# Altium PCB 8 IR.PcbDoc
Units mm, origin at the board's own origin, x right, y up, seen from the top; angles counter-clockwise.
Board outline 200 x 50 mm, 2 copper layers (Top Layer, Bottom Layer); 71 components, 43 nets, 170 pads, 0 vias.
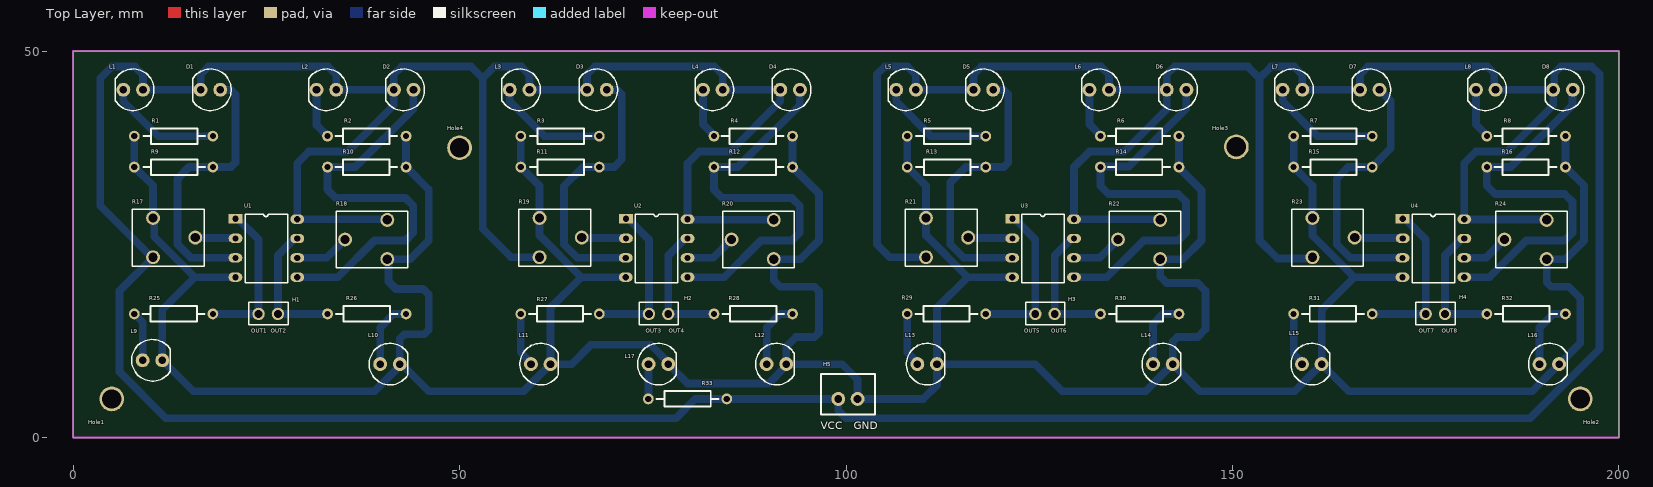
[diagram p0: Top Layer view]
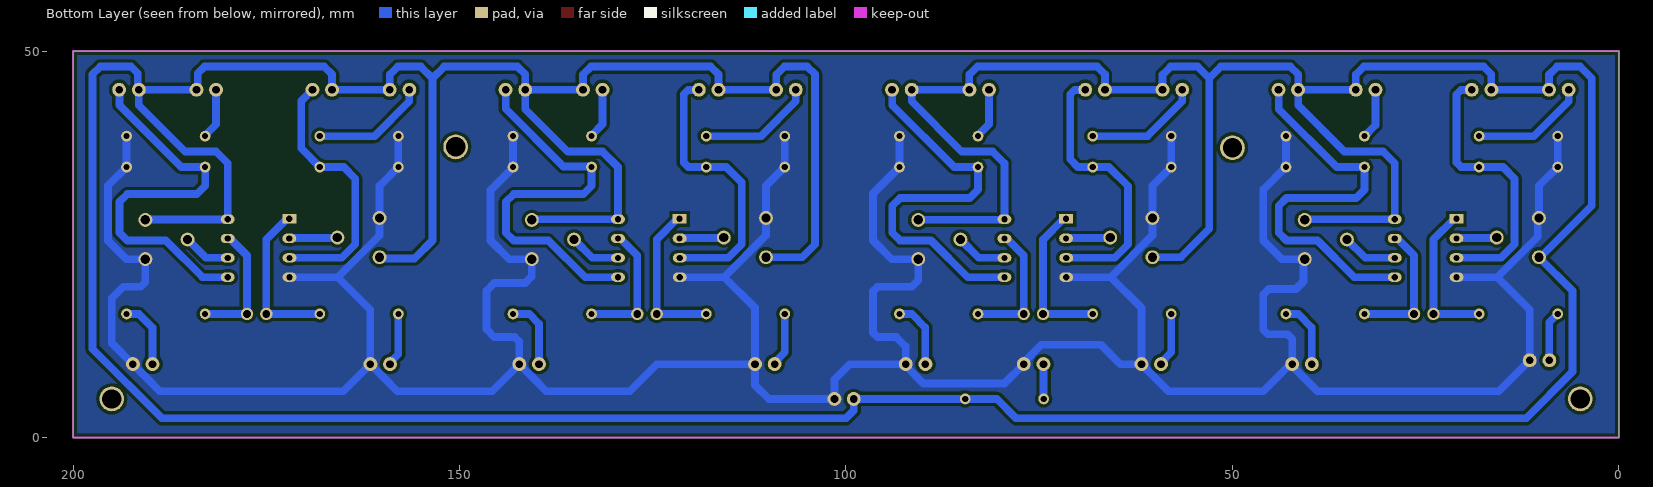
[diagram p1: Bottom Layer view, seen from below]
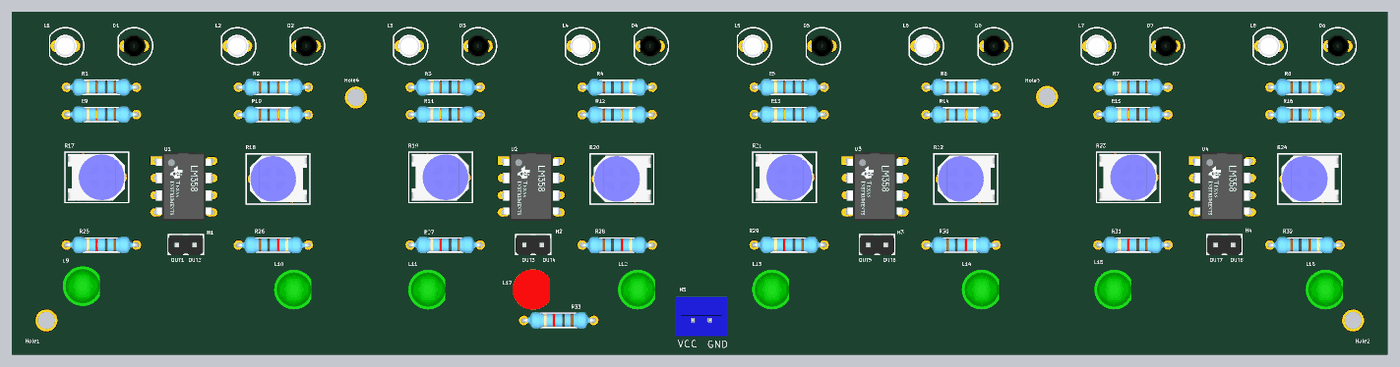
[diagram p2: 3D render of the assembled board from above, using the file's embedded part models]

## Layer stack, top to bottom
Top Solder: solder mask 0.0102, Solder Resist, Dk 3.5
Top Layer: signal copper 0.0356
Dielectric 1: dielectric 0.32, FR-4, Dk 4.8
Bottom Layer: signal copper 0.0356
Bottom Solder: solder mask 0.0102, Solder Resist, Dk 3.5

## Board outline
0,0 200,0 200,50 0,50

## Design rules (kind name [scope] priority, off if disabled: settings)
Clearance [All] p1: gap=0.4 ignorepadtopadclearanceinfootprint=FALSE
PolygonConnect [All] p1: connectstyle=Direct reliefconductorwidth=0.254 reliefentries=4 polygonreliefangle="90 Angle" airgapwidth=0.254
RoutingVias [All] p1: holewidth=0.711 width=1.27 viastyle="Through Hole" minholewidth=0.711 minwidth=1.27 maxholewidth=0.711 maxwidth=1.27
SilkToSolderMaskClearance [IsPad] p1: minsilkscreentomaskgap=0.001 clearancetoexposedcopper=TRUE
SolderMaskExpansion [All] p1: expansion=0.102 istentingtop=FALSE
UnRoutedNet [All] p1: checkbadconnections=TRUE
Width [All] p1: maxlimit=1 minlimit=0.254 preferedwidth=1
28 further rules are at their usual default settings.

## Components (designator, comment, footprint, x,y, rotation, side; value= is the part's Value field where it differs from the comment)
D1 "PHOTO DIODE" PHOYODIODE 17.77,45 r180 top
D2 "PHOTO DIODE" PHOYODIODE 42.77,45 r180 top
D3 "PHOTO DIODE" PHOYODIODE 67.77,45 r180 top
D4 "PHOTO DIODE" PHOYODIODE 92.77,45 r180 top
D5 "PHOTO DIODE" PHOYODIODE 117.77,45 r180 top
D6 "PHOTO DIODE" PHOYODIODE 142.77,45 r180 top
D7 "PHOTO DIODE" PHOYODIODE 167.77,45 r180 top
D8 "PHOTO DIODE" PHOYODIODE 192.77,45 r180 top
H1 "2 pin header" "header 2" 24,16 r0 top
H2 "2 pin header" "header 2" 74.5,16 r0 top
H3 "2 pin header" "header 2" 124.5,16 r0 top
H4 "2 pin header" "header 2" 175,16 r0 top
H5 "JST XH (2 pin)" "jst 2 pin XH" 99,5 r0 top
Hole1 "M3 hole 2.5MM" "M3 Hole" 5,5 r90 top
Hole2 "M3 hole 2.5MM" "M3 Hole" 195,5 r90 top
Hole3 "M3 hole 2.5MM" "M3 Hole" 150.505,37.608 r90 top
Hole4 "M3 hole 2.5MM" "M3 Hole" 50,37.5 r90 top
L1 "IR" "LED IR" 7.77,45 r180 top
L2 "IR" "LED IR" 32.77,45 r180 top
L3 "IR" "LED IR" 57.77,45 r180 top
L4 "IR" "LED IR" 82.77,45 r180 top
L5 "IR" "LED IR" 107.77,45 r180 top
L6 "IR" "LED IR" 132.77,45 r180 top
L7 "IR" "LED IR" 157.77,45 r180 top
L8 "IR" "LED IR" 182.77,45 r180 top
L9 "LED GREEN" "LED GREEN" 10.27,10 r0 top
L10 "LED GREEN" "LED GREEN" 41,9.5 r0 top
L11 "LED GREEN" "LED GREEN" 60.5,9.5 r0 top
L12 "LED GREEN" "LED GREEN" 91,9.5 r0 top
L13 "LED GREEN" "LED GREEN" 110.5,9.5 r0 top
L14 "LED GREEN" "LED GREEN" 141,9.5 r0 top
L15 "LED GREEN" "LED GREEN" 160.27,9.5 r0 top
L16 "LED GREEN" "LED GREEN" 191,9.5 r0 top
L17 "LED RED" "LED RED" 75.73,9.5 r0 top
R1 "100R" 100R 13,39 r180 top
R2 "100R" 100R 38,39 r0 top
R3 "100R" 100R 63,39 r180 top
R4 "100R" 100R 88,39 r0 top
R5 "100R" 100R 113,39 r180 top
R6 "100R" 100R 138,39 r0 top
R7 "100R" 100R 163,39 r180 top
R8 "100R" 100R 188,39 r0 top
R9 "10k" 10k 13,35 r180 top
R10 "10k" 10k 38,35 r0 top
R11 "10k" 10k 63,35 r180 top
R12 "10k" 10k 88,35 r0 top
R13 "10k" 10k 113,35 r180 top
R14 "10k" 10k 138,35 r0 top
R15 "10k" 10k 163,35 r180 top
R16 "10k" 10k 188,35 r0 top
R17 "10K" "trimer pot" 12,26 r270 top
R18 "10K" "trimer pot" 39,25.5 r90 top
R19 "10K" "trimer pot" 62,26 r270 top
R20 "10K" "trimer pot" 89,25.5 r90 top
R21 "10K" "trimer pot" 112,26 r270 top
R22 "10K" "trimer pot" 139,25.5 r90 top
R23 "10K" "trimer pot" 162,26 r270 top
R24 "10K" "trimer pot" 189,25.5 r90 top
R25 "1k" 1k 13,16 r180 top
R26 "1k" 1k 38,16 r0 top
R27 "1k" 1k 63,16 r180 top
R28 "1k" 1k 88,16 r0 top
R29 "1k" 1k 113,16 r180 top
R30 "1k" 1k 138,16 r0 top
R31 "1k" 1k 163,16 r180 top
R32 "1k" 1k 188,16 r0 top
R33 "1k" 1k 79.5,5 r180 top
U1 "LM358N" "LM 358 DIP" 25,24.5 r0 top
U2 "LM358N" "LM 358 DIP" 75.5,24.5 r0 top
U3 "LM358N" "LM 358 DIP" 125.5,24.5 r0 top
U4 "LM358N" "LM 358 DIP" 176,24.5 r0 top

## Footprints (in the part's own frame and the unit in brackets; to place one, negate y for a bottom-side part, rotate by r counter-clockwise, add the part's x,y. Pads: shape width x height; smd on the part's side, far side on the other; paste and mask are expansions set on the pad)
1k [mm]
  round 1.4 hole 0.8: 1(-5.08,0) 2(5.08,0)
  silkscreen extent -4,-1 4,1, body extent -5.38,-1.23 5.38,1.17, height 2.41
10k [mm]
  round 1.4 hole 0.8: 1(-5.08,0) 2(5.08,0)
  silkscreen extent -4.08,-1 3.92,1, body extent -5.38,-1.23 5.38,1.17, height 2.41
100R [mm]
  round 1.4 hole 0.8: 1(-5.08,0) 2(5.08,0)
  silkscreen extent -4.08,-1 3.92,1, body extent -5.38,-1.2 5.38,1.2, height 2.41
"header 2" [mm]
  round 1.6 hole 1: 1(0,0) 2(2.5,0)
  silkscreen extent -1.27,-1.4 3.81,1.52, body extent -1.27,-1.46 3.81,1.46, height 8.51
"jst 2 pin XH" [mm]
  round 1.8 hole 1: 1(0,0) 2(2.5,0)
  silkscreen extent -2.25,-2 4.75,3.25, body extent -2.5,-2.25 5,3.45, height 7
"LED GREEN" [mm]
  round 1.8 hole 1: A(-1.27,0) K(1.27,0)
  silkscreen extent -2.69,-2.69 2.3,2.69, body extent -2.9,-2.9 2.5,2.9, height 8.72
"LED IR" [mm]
  round 1.8 hole 1: A(-1.27,0) K(1.27,0)
  silkscreen extent -2.69,-2.69 2.3,2.69, body extent -1.64,-1.65 1.57,1.64, height 4.98
"LED RED" [mm]
  round 1.8 hole 1: A(-1.27,0) K(1.27,0)
  silkscreen extent -2.69,-2.69 2.3,2.69, body extent -2.95,-2.94 2.5,2.95, height 8.71
"LM 358 DIP" [mm]
  rect 1.8x1.2 hole 0.8: 1(-3.975,3.8)
  oval 1.8x1.2 hole 0.8: 2(-3.975,1.275) 3(-4,-1.25) 4(-4,-3.75) 5(4,-3.75) 6(4,-1.25) 7(4,1.25) 8(4,3.75)
  silkscreen extent -2.75,-4.5 2.75,4.4, body extent -4.15,-5 4.11,5, height 5.3
"M3 Hole" [mm]
  round 3.2 hole 2.5: 2(0,0)
PHOYODIODE [mm]
  round 1.8 hole 1: A(-1.27,0) K(1.27,0)
  silkscreen extent -2.69,-2.69 2.3,2.69, body extent -1.64,-1.65 1.57,1.64, height 4.98
"trimer pot" [mm]
  round 1.8 hole 1.2: 1(-2.413,-1.651) 2(2.667,-1.651) 3(0.127,3.81)
  silkscreen extent -3.56,-4.32 3.81,4.95, body extent -3.28,-3.86 3.53,4.39, height 7.62

## Part data
D1 D2 D3 D4 D5 D6 D7 D8: "VISHAY         BPW24R             PHOTODIODE, 11PF", Breakdown Voltage=200V, Case/Package=TO-18, Dark Current=2nA, Manufacturer 1="Vishay Semiconductors", Manufacturer Part Number 1=BPW24R, Max Operating Temperature=125°C, Max Power Dissipation=210mW, Max Reverse Voltage (DC)=60V, Min Operating Temperature=-40°C, Package Quantity=1000, Supplier Part Number 1=751-1014-ND, Category=Photodiodes, ComponentLink1Description=https://datasheet.ciiva.com/1249/bpw24r-1249072.pdf?src-supplier=Element14, ComponentLink1URL=https://datasheet.ciiva.com/1249/bpw24r-1249072.pdf?src-supplier=Element14, ComponentLink2Description=https://datasheet.ciiva.com/25620/0900766b80e22c13-25620417.pdf?src-supplier=RSComponents, ComponentLink2URL=https://datasheet.ciiva.com/25620/0900766b80e22c13-25620417.pdf?src-supplier=RSComponents, ComponentLink3Description=https://datasheet.ciiva.com/12069/bpw24r-84710-12069380.pdf?src-supplier=Mouser, ComponentLink3URL=https://datasheet.ciiva.com/12069/bpw24r-84710-12069380.pdf?src-supplier=Mouser, ComponentLink4Description=https://datasheet.ciiva.com/15117/getdatasheetpartid-513681-15117156.pdf?src-supplier=Verical, ComponentLink4URL=https://datasheet.ciiva.com/15117/getdatasheetpartid-513681-15117156.pdf?src-supplier=Verical, ComponentLink5Description=https://datasheet.ciiva.com/4269/bpw24r-4269996.pdf?src-supplier=Arrow+Electronics, ComponentLink5URL=https://datasheet.ciiva.com/4269/bpw24r-4269996.pdf?src-supplier=Arrow+Electronics, ComponentLink6Description=https://datasheet.ciiva.com/2819/bpw24r-2819745.pdf?src-supplier=Digi-Key, ComponentLink6URL=https://datasheet.ciiva.com/2819/bpw24r-2819745.pdf?src-supplier=Digi-Key, ComponentLink7Description=https://datasheet.ciiva.com/14098/bpw24r-eng-tds-14098567.pdf?src-supplier=Distrelec, ComponentLink7URL=https://datasheet.ciiva.com/14098/bpw24r-eng-tds-14098567.pdf?src-supplier=Distrelec, ComponentLink8Description=https://datasheet.ciiva.com/16349/bpw24r-16349740.pdf?src-supplier=Future+Electronics, ComponentLink8URL=https://datasheet.ciiva.com/16349/bpw24r-16349740.pdf?src-supplier=Future+Electronics, Diode Type=PIN, Fall Time=7ns, Height=6.15mm, Lead Free="Lead Free", Length=5.5mm, Mount="Through Hole,PCB", Number of Pins=2, Packaging=Bulk, Power Dissipation=210mW, Pricing 1="1=4.50000, 10=3.75000, 100=2.62500, 500=2.17500, 1000=1.99500, 2500=1.91250, 5000=1.87500, 10000=1.83750, 25000=1.83000 (USD)", Radiation Hardening=No, REACH SVHC=Unknown, Reverse Breakdown Voltage=60V, Reverse Voltage (DC)=60V, Rise Time=7ns, RoHS=Yes, Stock 1=330, Supplier 1=Digi-Key, Viewing Angle=24°, Wavelength=900nm, Width=5.5mm
H1 H2 H3 H4: "connector"
H5: "Conn Shrouded Header (4 Sides) HDR 2 POS 2.5mm Solder ST Thru-Hole Box", Color=Natural, Contact Resistance=20mR, Current Rating=3A, Housing Color=White, Insulation Resistance=1GR, Manufacturer=JST, Manufacturer Part Number=B2B-XH-A(LF)(SN), Max Operating Temperature=85°C, Max Voltage Rating (AC)=250V, Min Operating Temperature=-25°C, Supplier Part Number 1=73M9415, Category="FFC / FPC", ComponentLink1Description=https://datasheet.ciiva.com/26894/getdatasheetpartid-640357-26894434.pdf?src-supplier=Verical, ComponentLink1URL=https://datasheet.ciiva.com/26894/getdatasheetpartid-640357-26894434.pdf?src-supplier=Verical, ComponentLink2Description=https://datasheet.ciiva.com/11746/0900766b8082653e-11746979.pdf?src-supplier=RSComponents, ComponentLink2URL=https://datasheet.ciiva.com/11746/0900766b8082653e-11746979.pdf?src-supplier=RSComponents, ComponentLink3Description=https://datasheet.ciiva.com/26894/getdatasheetpartid-385291-26894760.pdf?src-supplier=Verical, ComponentLink3URL=https://datasheet.ciiva.com/26894/getdatasheetpartid-385291-26894760.pdf?src-supplier=Verical, ComponentLink4Description=https://datasheet.ciiva.com/8052/5448-8052024.pdf?src-supplier=Element14, ComponentLink4URL=https://datasheet.ciiva.com/8052/5448-8052024.pdf?src-supplier=Element14, ComponentLink5Description=https://datasheet.ciiva.com/20207/523653-20207167.pdf?src-supplier=Rapid+Electronics, ComponentLink5URL=https://datasheet.ciiva.com/20207/523653-20207167.pdf?src-supplier=Rapid+Electronics, Connector Type="Male Pin", Contact Material=Brass, Contact Plating=Tin,Copper,Lead, Depth=5.75mm, Fastening Type=Detent, Housing Material=Polyamide, Lead Free="Lead Free", Lead Pitch=2.5mm, Length=7.4mm, Max Current Rating=3A, Max Voltage Rating (DC)=250V, Mount="Through Hole", Number of Contacts=2, Number of Positions=2, Number of Rows=1, Orientation=Straight, Packaging=Bulk, Pitch=2.5mm, Pricing 1="1=0.26000, 10=0.22300, 100=0.19700, 500=0.17500, 1000=0.17100, 5000=0.15500, 10000=0.14500 (USD)", REACH SVHC="No SVHC", RoHS=Yes, Stock 1=263047, Supplier 1=Newark, Termination=Solder, Voltage Rating=250V, Voltage Rating (AC)=250V, Wire/Cable Gauge=22AWG
Hole1 Hole2 Hole3 Hole4: "Mounting hole"
L1 L2 L3 L4 L5 L6 L7 L8: "EMITTER IR 940NM 100MA RADIAL", Case/Package=Radial, Forward Current=50mA, Forward Voltage=1.2V, Manufacturer 1=Everlight, Manufacturer Part Number 1=IR333-A, Max Operating Temperature=85°C, Max Power Dissipation=100mW, Min Operating Temperature=-40°C, Package Quantity=500, Reverse Voltage=5V, Supplier Part Number 1=1080-1080-ND, Test Current=20mA, Category=LEDs, ComponentLink1Description=https://datasheet.ciiva.com/48438/ir333-a-eng-tds-48438869.pdf?src-supplier=Distrelec, ComponentLink1URL=https://datasheet.ciiva.com/48438/ir333-a-eng-tds-48438869.pdf?src-supplier=Distrelec, ComponentLink2Description=https://datasheet.ciiva.com/2107/201407061516067600-2107736.pdf?src-supplier=Digi-Key, ComponentLink2URL=https://datasheet.ciiva.com/2107/201407061516067600-2107736.pdf?src-supplier=Digi-Key, Depth=5.9mm, Lead Free="Lead Free", Length=5.9mm, Lens Style=Diffused,Colored,Circular, Mount="Through Hole", Number of Elements=1, Number of LEDs=1, Number of Pins=2, Orientation="Top View", Packaging=Bulk, Power Dissipation=100mW, Pricing 1="1=0.44000, 10=0.31500, 100=0.14000, 500=0.09800, 1000=0.08050, 2500=0.07000, 5000=0.06300, 10000=0.05600, 25000=0.05250 (USD)", RoHS=Yes, Stock 1=103626, Supplier 1=Digi-Key, Viewing Angle=20°, Wavelength=940nm
L9 L10 L11 L12 L13 L14 L15 L16: "LED GREEN DIFFUSED T-1 3/4 T/H", Capacitance=35pF, Case/Package=Radial, Color=Green, Forward Current=30mA, Forward Voltage=2.1V, Manufacturer 1="Vishay Lite-On", Manufacturer Part Number 1=LTL-4233, Max Operating Temperature=100°C, Max Power Dissipation=100mW, Min Operating Temperature=-55°C, Package Quantity=1000, Reverse Voltage=5V, Supplier Part Number 1=160-1130-ND, Test Current=10mA, Category=LEDs, ComponentLink1Description=https://datasheet.ciiva.com/2112/ltl-4233-2112286.pdf?src-supplier=Digi-Key, ComponentLink1URL=https://datasheet.ciiva.com/2112/ltl-4233-2112286.pdf?src-supplier=Digi-Key, ComponentLink2Description=https://datasheet.ciiva.com/15117/getdatasheetpartid-116706-15117565.pdf?src-supplier=Verical, ComponentLink2URL=https://datasheet.ciiva.com/15117/getdatasheetpartid-116706-15117565.pdf?src-supplier=Verical, ComponentLink3Description=https://datasheet.ciiva.com/30255/s-110-ltl-4233-30255321.pdf?src-supplier=Onlinecomponents.com, ComponentLink3URL=https://datasheet.ciiva.com/30255/s-110-ltl-4233-30255321.pdf?src-supplier=Onlinecomponents.com, Depth=5.6mm, Diameter=5mm, Dominant Wavelength=573nm, Height=8.6mm, Illumination Color=Green, Lead Free="Lead Free", Length=5.6mm, Lens Color=Green, Lens Style=Dome,Diffused,Colored,Circular, Lens Transparency=Diffused, Luminous Intensity=19mcd, Mount="Through Hole", Number of Elements=1, Number of LEDs=1, Number of Pins=2, Packaging=Bulk, Power Dissipation=100mW, Pricing 1="1=0.36000, 10=0.26200, 100=0.12420, 500=0.08280, 1000=0.06486, 2500=0.06348, 5000=0.05520, 10000=0.04968, 25000=0.04416 (USD)", Radiation Hardening=No, RoHS=Yes, Stock 1=87589, Supplier 1=Digi-Key, Viewing Angle=36°, Wavelength=569nm, Width=5.6mm
L17: "LED RED CLEAR 5MM OVAL T/H", Case/Package=Radial, Color=Red, Forward Current=20mA, Forward Voltage=2.1V, Manufacturer 1=Cree, Manufacturer Part Number 1=C5SMF-RJF-CT0W0BB1, Max Operating Temperature=95°C, Min Operating Temperature=-40°C, Package Quantity=500, Supplier Part Number 1=C5SMF-RJF-CT0W0BB1-ND, Category=LEDs, ComponentLink1Description=https://datasheet.ciiva.com/29562/c5smfrjfrjegjfgjebjfbje1240-29562716.pdf?src-supplier=Digi-Key, ComponentLink1URL=https://datasheet.ciiva.com/29562/c5smfrjfrjegjfgjebjfbje1240-29562716.pdf?src-supplier=Digi-Key, Dominant Wavelength=621nm, Height=10.95mm, Illumination Color=Red, Lens Color=Red, Lens Style=Elliptical, Lens Transparency=Clear, Luminous Intensity=2640mcd, Mount="Through Hole", Packaging=Bulk, Pricing 1="1=0.14000, 10=0.13200, 100=0.12160, 1000=0.10877, 50000=0.10100 (USD)", RoHS=Yes, Stock 1=17201, Supplier 1=Digi-Key, Test Current=20mA, Viewing Angle=40°
R1 R2 R3 R4 R5 R6 R7 R8: "RES 100 OHM 1/4W 5% AXIAL", Case/Package=Conformal, Manufacturer 1="Stackpole Electronics", Manufacturer Part Number 1=CF14JT100R, Max Operating Temperature=155°C, Max Power Dissipation=250mW, Min Operating Temperature=-55°C, Package Quantity=1, Supplier Part Number 1=CF14JT100RCT-ND, Temperature Coefficient=-400ppm/°C, Tolerance=5%, Category="Through-Hole Resistors", ComponentLink1Description=http://components.arrow.com/part/dataview/50573446S9848635N1174?src-supplier=Arrow, ComponentLink1URL=http://components.arrow.com/part/dataview/50573446S9848635N1174?src-supplier=Arrow, ComponentLink2Description=https://www.seielect.com/catalog/SEI-Packaging.pdf?src-supplier=Digi-Key, ComponentLink2URL=https://www.seielect.com/catalog/SEI-Packaging.pdf?src-supplier=Digi-Key, ComponentLink3Description=https://www.seielect.com/Catalog/SEI-CF_CFM.pdf?src-supplier=Digi-Key, ComponentLink3URL=https://www.seielect.com/Catalog/SEI-CF_CFM.pdf?src-supplier=Digi-Key, ComponentLink4Description=https://www.verical.com/server-webapp/html/getDatasheet?partID=360125&src-supplier=Verical, ComponentLink4URL=https://www.verical.com/server-webapp/html/getDatasheet?partID=360125&src-supplier=Verical, ComponentLink5Description=https://www.seielect.com/catalog/SEI-CF_CFM.pdf?src-supplier=Avnet, ComponentLink5URL=https://www.seielect.com/catalog/SEI-CF_CFM.pdf?src-supplier=Avnet, ComponentLink6Description=http://www.seielect.com/Catalog/SEI-CF_CFM.pdf?src-supplier=Future+Electronics, ComponentLink6URL=http://www.seielect.com/Catalog/SEI-CF_CFM.pdf?src-supplier=Future+Electronics, Composition="Carbon Film", Contact Plating=Tin,Matte, Diameter=2.3mm, Features="Flame Retardant Coating", Lead Free="Lead Free", Length=6.5mm, Military Standard=Not, Mount="Through Hole,Axial", Number of Terminations=2, Packaging="Tape and Reel", Power Rating=250mW, Pricing 1="1=0.10000, 10=0.04000, 25=0.02880, 50=0.02200, 100=0.01620, 250=0.01236, 500=0.00990, 1000=0.00729 (USD)", Radiation Hardening=No, Resistance=100R, RoHS=Yes, Stock 1=277395, Supplier 1=Digi-Key, Termination=Axial
R9 R10 R11 R12 R13 R14 R15 R16: "RES 10K OHM 1/4W 5% AXIAL", Case/Package=Conformal, Manufacturer 1="Stackpole Electronics", Manufacturer Part Number 1=CF14JT10K0, Max Operating Temperature=155°C, Max Power Dissipation=250mW, Min Operating Temperature=-55°C, Package Quantity=1, Resistance=10kR, Supplier Part Number 1=CF14JT10K0CT-ND, Temperature Coefficient=-500ppm/°C, Tolerance=5%, Category="Through-Hole Resistors", ComponentLink1Description=https://www.verical.com/server-webapp/html/getDatasheet?partID=367360&src-supplier=Verical, ComponentLink1URL=https://www.verical.com/server-webapp/html/getDatasheet?partID=367360&src-supplier=Verical, ComponentLink2Description=https://www.seielect.com/catalog/SEI-CF_CFM.pdf?src-supplier=Avnet, ComponentLink2URL=https://www.seielect.com/catalog/SEI-CF_CFM.pdf?src-supplier=Avnet, ComponentLink3Description=http://www.seielect.com/Catalog/SEI-CF_CFM.pdf?src-supplier=Future+Electronics, ComponentLink3URL=http://www.seielect.com/Catalog/SEI-CF_CFM.pdf?src-supplier=Future+Electronics, ComponentLink4Description=https://www.seielect.com/catalog/SEI-Packaging.pdf?src-supplier=Digi-Key, ComponentLink4URL=https://www.seielect.com/catalog/SEI-Packaging.pdf?src-supplier=Digi-Key, ComponentLink5Description=http://components.arrow.com/part/dataview/27619991S9848636N1174?src-supplier=Arrow, ComponentLink5URL=http://components.arrow.com/part/dataview/27619991S9848636N1174?src-supplier=Arrow, Composition="Carbon Film", Contact Plating=Tin,Matte, Diameter=2.3mm, Features="Flame Retardant Coating", Lead Free="Lead Free", Length=6.5mm, Military Standard=Not, Mount="Through Hole,Axial", Number of Terminations=2, Packaging="Tape and Reel", Power Rating=250mW, Pricing 1="1=0.10000, 10=0.04000, 25=0.02880, 50=0.02200, 100=0.01620, 250=0.01236, 500=0.00990, 1000=0.00729 (USD)", Radiation Hardening=No, RoHS=Yes, Stock 1=746193, Supplier 1=Digi-Key, Termination=Axial
R17 R18 R19 R20 R21 R22 R23 R24: library part "potentiometer 1", "Trimmer pot comman for all"
R25 R26 R27 R28 R29 R30 R31 R32 R33: "Res Carbon Film 1K Ohm 5% 0.25W(1/4W) -400ppm/? to 0ppm/? Conformal Coated AXL T/R", Case/Package=Conformal, Manufacturer 1="Stackpole Electronics", Manufacturer Part Number 1=CF14JT1K00, Max Operating Temperature=155°C, Max Power Dissipation=250mW, Min Operating Temperature=-55°C, Package Quantity=1, Resistance=1kR, Supplier Part Number 1=CF14JT1K00CT-ND, Temperature Coefficient=-400ppm/°C, Tolerance=5%, Category="Through-Hole Resistors", ComponentLink1Description=http://www.seielect.com/Catalog/SEI-CF_CFM.pdf?src-supplier=Future+Electronics, ComponentLink1URL=http://www.seielect.com/Catalog/SEI-CF_CFM.pdf?src-supplier=Future+Electronics, ComponentLink2Description=https://www.seielect.com/catalog/SEI-CF_CFM.pdf?src-supplier=Avnet, ComponentLink2URL=https://www.seielect.com/catalog/SEI-CF_CFM.pdf?src-supplier=Avnet, ComponentLink3Description=https://www.seielect.com/catalog/SEI-Packaging.pdf?src-supplier=Digi-Key, ComponentLink3URL=https://www.seielect.com/catalog/SEI-Packaging.pdf?src-supplier=Digi-Key, ComponentLink4Description=https://www.seielect.com/Catalog/SEI-CF_CFM.pdf?src-supplier=Digi-Key, ComponentLink4URL=https://www.seielect.com/Catalog/SEI-CF_CFM.pdf?src-supplier=Digi-Key, ComponentLink5Description=http://components.arrow.com/part/dataview/27620077S9848643N1174?src-supplier=Arrow, ComponentLink5URL=http://components.arrow.com/part/dataview/27620077S9848643N1174?src-supplier=Arrow, ComponentLink6Description=https://www.verical.com/server-webapp/html/getDatasheet?partID=360403&src-supplier=Verical, ComponentLink6URL=https://www.verical.com/server-webapp/html/getDatasheet?partID=360403&src-supplier=Verical, Composition="Carbon Film", Contact Plating=Tin,Matte, Diameter=2.3mm, Features="Flame Retardant Coating", Lead Free="Lead Free", Length=6.5mm, Military Standard=Not, Mount="Through Hole,Axial", Number of Terminations=2, Packaging="Tape and Reel", Power Rating=250mW, Pricing 1="1=0.10000, 10=0.04000, 25=0.02880, 50=0.02200, 100=0.01620, 250=0.01236, 500=0.00990, 1000=0.00729 (USD)", Radiation Hardening=No, RoHS=Yes, Stock 1=806014, Supplier 1=Digi-Key, Termination=Axial
U1 U2 U3 U4: "TEXAS INSTRUMENTS - LM358N/NOPB - OP AMP DUAL", Case/Package=DIP, Input Bias Current=45nA, Input Offset Voltage (Vos)=2mV, Manufacturer 1="Texas Instruments", Manufacturer Part Number 1=LM358N/NOPB, Max Dual Supply Voltage=16V, Max Operating Temperature=70°C, Max Power Dissipation=830mW, Max Supply Current=1.2mA, Max Supply Voltage=32V, Min Dual Supply Voltage=1.5V, Min Operating Temperature=0°C, Min Supply Voltage=3V, Nominal Supply Current=1mA, Operating Supply Voltage=5V, Output Current=20mA, Output Current per Channel=40mA, Power Supply Rejection Ratio (PSRR)=65dB, Supplier Part Number 1=LM358NNS/NOPB-ND, Voltage Gain=100dB, Bandwidth=1MHz, Category="Amplifiers - Op Amps, Buffer, Instrumentation", Common Mode Rejection Ratio=65dB, ComponentLink1Description=https://datasheet.ciiva.com/49046/1902748-49046503.pdf?src-supplier=Element14, ComponentLink1URL=https://datasheet.ciiva.com/49046/1902748-49046503.pdf?src-supplier=Element14, Contact Plating=Tin,Matte, Gain Bandwidth Product=1MHz, Height=3.3mm, Lead Free="Lead Free", Length=9.27mm, Mount="Through Hole", Number of Amplifiers=2, Number of Channels=2, Number of Circuits=2, Number of Elements=2, Number of Pins=8, Packaging=Rail/Tube, Power Dissipation=830mW, Pricing 1="1=0.87000, 10=0.77900, 25=0.73920, 100=0.56760, 250=0.50160, 500=0.47520, 1000=0.36960, 2500=0.35112, 5000=0.33792 (USD)", REACH SVHC="No SVHC", RoHS=Yes, Slew Rate=0.1V/µs, Stock 1=26579, Supplier 1=Digi-Key, Unity Gain Bandwidth Product=1MHz, Width=6.35mm

## Nets (pads, with @x,y where several pads share a name; then routed paths per layer and width w, separated by ;. In a path a pad name is that pad's centre, name@x,y a point inside that pad or via, vN(x,y) a via of type N, cw(c..) or ccw(c..) an arc to the next point about the centre after c; other vN are vias at no path point)
GND: H5.2 L9.K L10.K L11.K L12.K L13.K L14.K L15.K L16.K L17.K R1.2 R2.2 R3.2 R4.2 R5.2 R6.2 R7.2 R8.2 R9.2 R10.2 R11.2 R12.2 R13.2 R14.2 R15.2 R16.2 R17.1 R18.1 R19.1 R20.1 R21.1 R22.1 R23.1 R24.1 U1.4 U2.4 U3.4 U4.4 | length 532.7
  Bottom Layer w1: R1.2 R9.2 10.349,32.571 R17.1 10.5,28.262 10.5,26 15.75,20.75 ; U1.4 15.75,20.75 ; L10.K@41.87,8.87 39,6 15.54,6 L9.K 11.54,16.54 15.75,20.75 ; R2.2 R10.2 46,32.08 46,25.5 43.587,23.087 R18.1 40.804,22.934 40.804,20.196 41.783,19.217 45.283,19.217 46,18.5 46,13.968 45.414,13.383 42.883,13.383 42.27,12.77 L10.K 42.486,9.5 42.886,9.1 42.9,9.1 46,6 58.276,6 61.77,9.494 L11.K ; R3.2 R11.2 60.349,32.571 R19.1 60.349,26.151 65.75,20.75 ; U2.4 65.75,20.75 ; R4.2 R12.2 96.5,31.58 96.5,25.5 94.087,23.087 R20.1 90.651,20.349 91.5,19.5 95.914,19.5 96.5,18.914 96.5,13.586 95.914,13 93.5,13 92.27,11.77 L12.K ; R5.2 R13.2 110.349,32.571 R21.1 110.349,26.151 115.75,20.75 ; U3.4 115.75,20.75 ; R6.2 R14.2 143.08,34.92 146,32 146,25.5 143.587,23.087 R22.1 140.651,20.849 141.5,20 145.5,20 146.5,19 146.5,14 145.5,13 142.856,13 142.27,12.414 L14.K ; R7.2 R15.2 160.349,32.571 R23.1 160.415,28.347 160.349,28.281 160.349,26.151 165.75,20.75 ; U4.4 165.75,20.75 ; R8.2 R16.2 195.5,32.58 195.5,25.5 193.087,23.087 R24.1 190.651,20.086 191.237,19.5 193.5,19.5 195,18 195,12.23 L16.K 192.27,9.494 190.476,7.7 190.47,7.7 188.77,6 165.04,6 L15.K ; L11.K 64.5,9.5 67,12 74.716,12 77,9.716 L17.K 79.5,7 89.986,7 92.27,9.284 L12.K ; L11.K 61.77,16.77 65.75,20.75 ; L12.K 99.5,9.5 101.5,7.5 H5.2 110,5 111.77,6.77 L13.K ; L13.K 124.5,9.5 128,6 138.77,6 140.47,7.7 140.476,7.7 142.27,9.494 L14.K ; L13.K 111.77,16.77 115.75,20.75 ; L14.K 145.77,6 158.04,6 159.74,7.7 159.746,7.7 161.54,9.494 L15.K ; L15.K 161.54,16.54 165.75,20.75
INV1: R17.3 U1.2 | length 5.3
  Bottom Layer w1: R17.3 15.87,25.813 20.987,25.813 U1.2
INV2: R18.3 U1.6 | length 7.2
  Bottom Layer w1: U1.6 32.813,23.25 R18.3
INV3: R19.3 U2.2 | length 5.8
  Bottom Layer w1: R19.3 65.87,25.813 71.487,25.813 U2.2
INV4: R20.3 U2.6 | length 6.7
  Bottom Layer w1: U2.6 82.813,23.25 R20.3
INV5: R21.3 U3.2 | length 5.8
  Bottom Layer w1: R21.3 115.87,25.813 121.487,25.813 U3.2
INV6: R22.3 U3.6 | length 6.7
  Bottom Layer w1: U3.6 132.813,23.25 R22.3
INV7: R23.3 U4.2 | length 6.3
  Bottom Layer w1: R23.3 165.87,25.813 171.987,25.813 U4.2
INV8: R24.3 U4.6 | length 6.2
  Bottom Layer w1: U4.6 182.813,23.25 R24.3
NetL1_K: L1.K R1.1 | length 14.9
  Bottom Layer w1: L1.K 6.5,43.5 11,39 R1.1
NetL2_K: L2.K R2.1 | length 6.6
  Bottom Layer w1: L2.K 31.5,40.42 R2.1
NetL3_K: L3.K R3.1 | length 14.9
  Bottom Layer w1: L3.K 56.5,43.5 61,39 R3.1
NetL4_K: L4.K R4.1 | length 6.6
  Bottom Layer w1: L4.K 81.5,40.528 82.92,39.108 R4.1
NetL5_K: L5.K R5.1 | length 14.9
  Bottom Layer w1: L5.K 106.5,43.5 111,39 R5.1
NetL6_K: L6.K R6.1 | length 6.6
  Bottom Layer w1: L6.K 131.5,40.528 132.92,39.108 R6.1
NetL7_K: L7.K R7.1 | length 14.9
  Bottom Layer w1: L7.K 156.5,43.5 161,39 R7.1
NetL8_K: L8.K R8.1 | length 6.6
  Bottom Layer w1: L8.K 181.5,40.528 182.92,39.108 R8.1
NetL9_A: L9.A R25.2 | length 6.4
  Bottom Layer w1: R25.2 9,14.92 L9.A
NetL10_A: L10.A R26.2 | length 8.8
  Bottom Layer w1: L10.A 39.73,14.23 41.5,16 R26.2
NetL11_A: L11.A R27.2 | length 7
  Bottom Layer w1: R27.2 57.92,11.026 59.23,9.716 L11.A
NetL12_A: L12.A R28.2 | length 8.8
  Bottom Layer w1: L12.A 89.73,14.23 91.5,16 R28.2
NetL13_A: L13.A R29.2 | length 7
  Bottom Layer w1: R29.2 107.92,11.026 109.23,9.716 L13.A
NetL14_A: L14.A R30.2 | length 9.1
  Bottom Layer w1: L14.A 139.73,14.73 141,16 R30.2
NetL15_A: L15.A R31.2 | length 6.9
  Bottom Layer w1: R31.2 157.92,10.796 159,9.716 L15.A
NetL16_A: L16.A R32.2 | length 8.8
  Bottom Layer w1: L16.A 189.73,14.23 191.484,15.984 193.064,15.984 R32.2
NetL17_A: L17.A R33.2 | length 4.5
  Bottom Layer w1: R33.2 74.44,5.02 74.44,9.48 L17.A
"NON INV1": D1.A R9.1 U1.3 | length 36.1
  Bottom Layer w1: D1.A 19.06,44.98 20.414,44.98 21,44.394 21,35.586 20.414,35 15,35 13.5,33.5 13.5,25 15.25,23.25 U1.3
"NON INV2": D2.A R10.1 U1.5 | length 52.4
  Bottom Layer w1: U1.5 34.25,20.75 39,25.5 43,25.5 44,26.5 44,30 43,31 34,31 32.92,32.08 R10.1 36.5,35 44,42.5 44,44.96 D2.A
"NON INV3": D3.A R11.1 U2.3 | length 35.8
  Bottom Layer w1: D3.A 69.06,44.98 70.414,44.98 71,44.394 71,36 70,35 R11.1 66,35 63.5,32.5 63.5,25 65.25,23.25 U2.3
"NON INV4": D4.A R12.1 U2.5 | length 51.7
  Bottom Layer w1: U2.5 84.25,20.75 89,25.5 93,25.5 94,26.5 94,30 93,31 84,31 82.92,32.08 R12.1 86,35 94,43 94,44.96 D4.A
"NON INV5": D5.A R13.1 U3.3 | length 36.3
  Bottom Layer w1: D5.A 119.06,44.98 120.414,44.98 121,44.394 121,35.586 120.414,35 R13.1 115.5,35 113.5,33 113.5,25 115.25,23.25 U3.3
"NON INV6": D6.A R14.1 U3.5 | length 51.9
  Bottom Layer w1: U3.5 133.75,20.75 138.5,25.5 143,25.5 144,26.5 144,30.5 143,31.5 134,31.5 132.92,32.58 R14.1 132.997,35.077 136.577,35.077 144.04,42.54 D6.A
"NON INV7": D7.A R15.1 U4.3 | length 34.5
  Bottom Layer w1: D7.A 170.5,43.54 170.5,37.42 R15.1 165,35 163.5,33.5 163.5,25 165.25,23.25 U4.3
"NON INV8": D8.A R16.1 U4.5 | length 51.2
  Bottom Layer w1: U4.5 183.25,20.75 188,25.5 193,25.5 194,26.5 194,30.5 193,31.5 184,31.5 182.92,32.58 R16.1 186,35 194,43 194,44.96 D8.A
OUT1: H1.1 R25.1 U1.1 | length 19.6
  Bottom Layer w1: R25.1 H1.1 24,25.625 21.325,28.3 U1.1
OUT2: H1.2 R26.1 U1.7 | length 17.7
  Bottom Layer w1: U1.7@29.3,25.75 U1.7 28.7,25.75 26.5,23.55 H1.2 R26.1
OUT3: H2.1 R27.1 U2.1 | length 20.1
  Bottom Layer w1: R27.1 H2.1 74.5,25.625 71.825,28.3 U2.1
OUT4: H2.2 R28.1 U2.7 | length 17.1
  Bottom Layer w1: U2.7@79.75,25.75 U2.7 79.2,25.75 77,23.55 H2.2 R28.1
OUT5: H3.1 R29.1 U3.1 | length 20.1
  Bottom Layer w1: R29.1 H3.1 124.5,25.625 121.825,28.3 U3.1
OUT6: H3.2 R30.1 U3.7 | length 17.2
  Bottom Layer w1: U3.7@129.8,25.75 U3.7 129.2,25.75 127,23.55 H3.2 R30.1
OUT7: H4.1 R31.1 U4.1 | length 20.6
  Bottom Layer w1: R31.1 H4.1 175,25.625 172.325,28.3 U4.1
OUT8: H4.2 R32.1 U4.7 | length 16.4
  Bottom Layer w1: U4.7 179.7,25.75 177.5,23.55 H4.2 R32.1
VCC: D1.K D2.K D3.K D4.K D5.K D6.K D7.K D8.K H5.1 L1.A L2.A L3.A L4.A L5.A L6.A L7.A L8.A R17.2 R18.2 R19.2 R20.2 R21.2 R22.2 R23.2 R24.2 R33.1 U1.8 U2.8 U3.8 U4.8 | length 728.5
  Bottom Layer w1: R18.2 40.568,28.25 U1.8 29,35.5 30.5,37 35.5,37 41.5,43 D2.K ; R19.2 56.667,23.333 53,27 53,46.5 ; R20.2 80.024,28.167 79.98,28.212 79.538,28.212 U2.8 79.5,35.5 81,37 85,37 91.5,43.5 D4.K L4.A 84.04,46.96 83,48 67.5,48 66.5,47 D3.K L3.A 59.04,46.96 58,48 54.5,48 53,46.5 ; R21.2 105.667,23.333 104,25 104,47 105,48 108,48 109.04,46.96 L5.A D5.K 116.5,47 117.5,48 133,48 134.04,46.96 L6.A D6.K ; R22.2 140.568,28.25 U3.8 129.5,35 131.5,37 136,37 141.5,42.5 D6.K ; R23.2 160.196,23.18 155.82,23.18 153.5,25.5 153.5,46 153.5,46.5 ; R24.2 190.606,28.212 180.038,28.212 U4.8 180,35.5 181.5,37 185.5,37 191.5,43 D8.K ; D2.K 41.5,47 42.5,48 51.5,48 53,46.5 ; D2.K L2.A 34.04,46.96 33,48 17.5,48 16.5,47 D1.K L1.A 9.04,46.96 8,48 5,48 3.5,46.5 3.5,30 10.167,23.333 R17.2 6,18.984 6,8.5 12,2.5 78,2.5 80.5,5 R33.1 H5.1 99,3.5 100,2.5 188.5,2.5 197.5,11.5 197.5,47 196.5,48 192.5,48 191.653,47.153 191.653,45.153 D8.K ; D6.K 141.5,47 142.5,48 152,48 153.5,46.5 ; 153.5,46.5 155,48 158,48 159.04,46.96 L7.A D7.K 166.5,47 167.5,48 183,48 183.887,47.113 183.887,45.153 L8.A D8.K
pads on no net: Hole1.2 Hole2.2 Hole3.2 Hole4.2

## Polygon pours and split planes (outlines as drawn)
GND on Bottom Layer "GND_L02_P000" (solid, remove dead copper, pour order 0): 0.5,49.5 199.5,49.5 199.5,0.5 0.5,0.5

## Keep-outs
Keep-Out Layer:
  the board outline again, w0.254

## Silkscreen, mask and mechanical layers (free items; w line width, h text height)
Top Overlay:
  text "OUT1" at 23.08,13.58 h0.5
  text "OUT2" at 25.58,13.58 h0.5
  text "OUT3" at 74.08,13.58 h0.5
  text "OUT4" at 77.08,13.58 h0.5
  text "OUT5" at 123.08,13.58 h0.5
  text "OUT6" at 126.58,13.58 h0.5
  text "OUT7" at 174.08,13.58 h0.5
  text "OUT8" at 177.08,13.58 h0.5
  text "VCC" at 96.725,1.1 h1
  text "GND" at 101,1.05 h1